# Altium PCB PCB2.PcbDoc
Units mm, origin at the board's own origin, x right, y up, seen from the top; angles counter-clockwise.
Board outline 36.13 x 29.98 mm, 2 copper layers (Top Layer, Bottom Layer); 5 components, 8 nets, 40 pads, 0 vias.
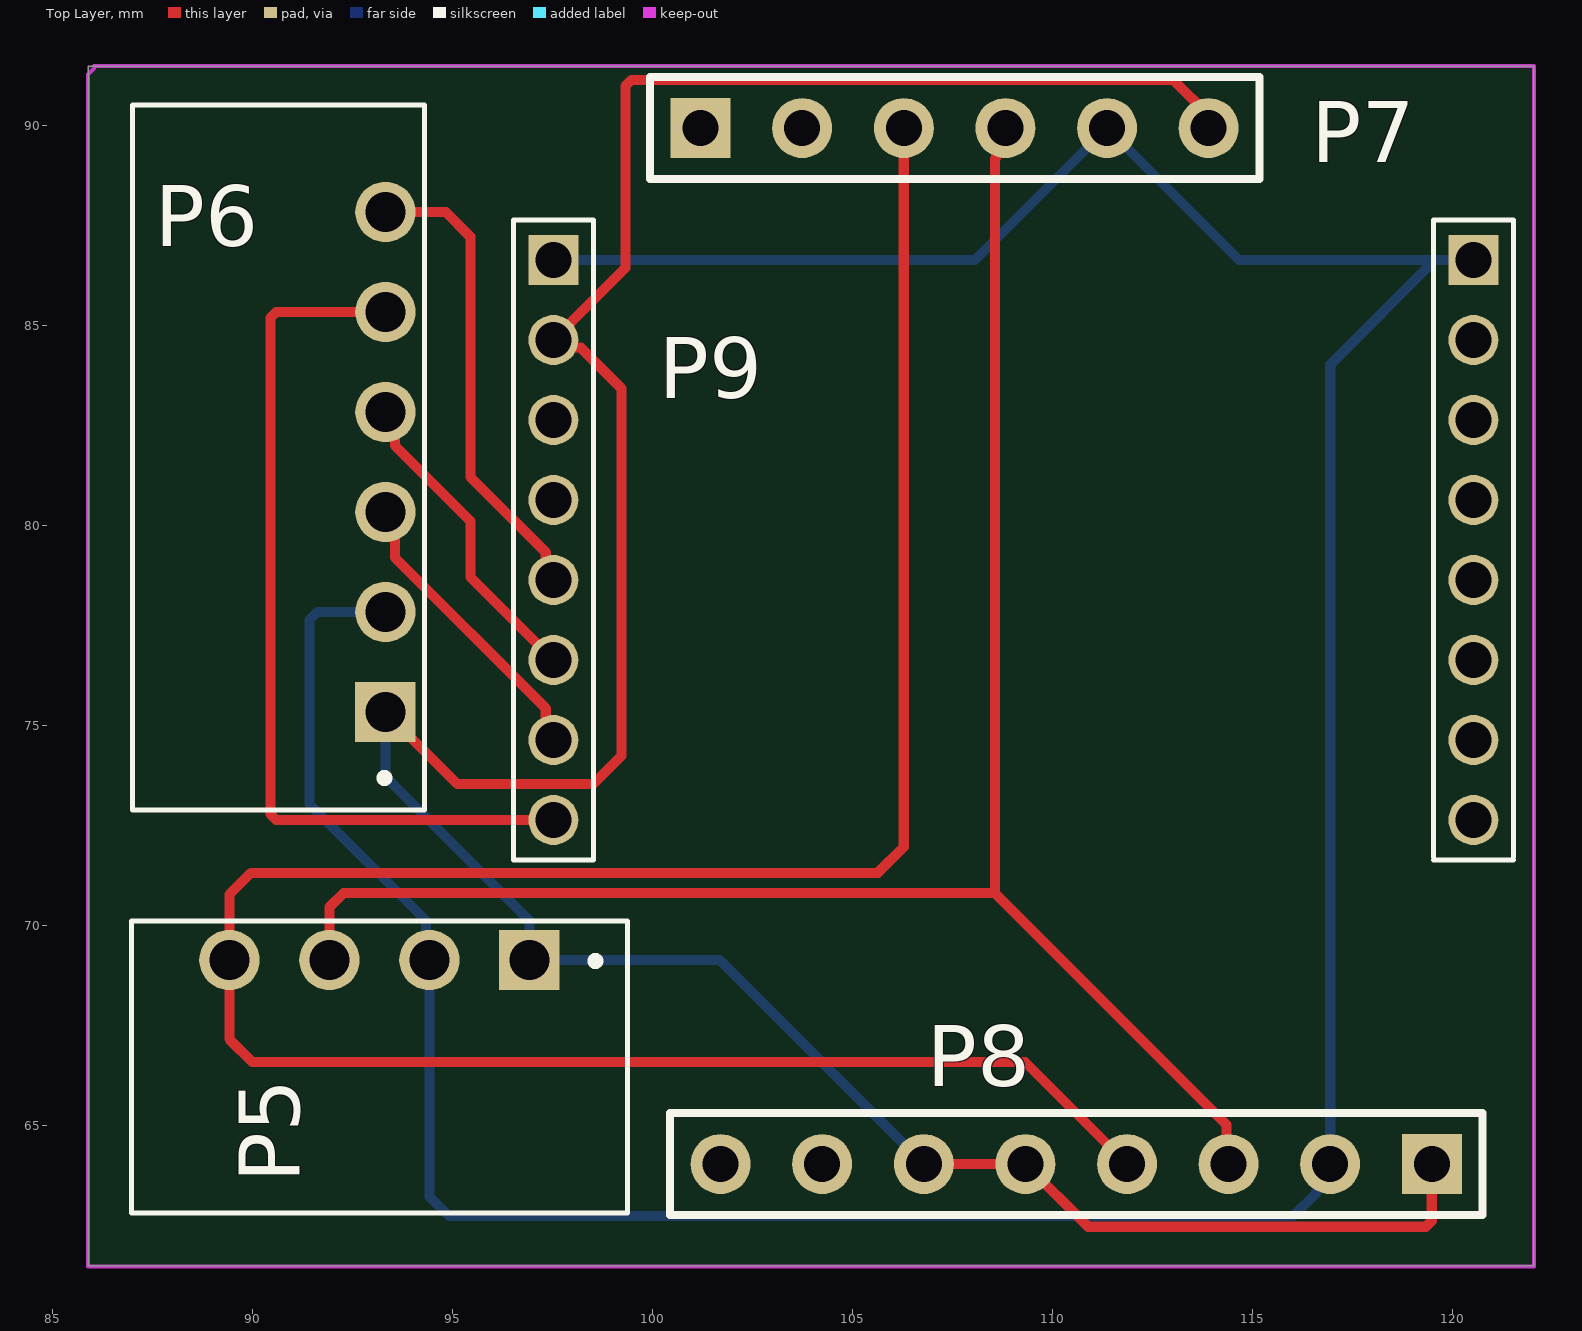
[diagram p0: Top Layer view]
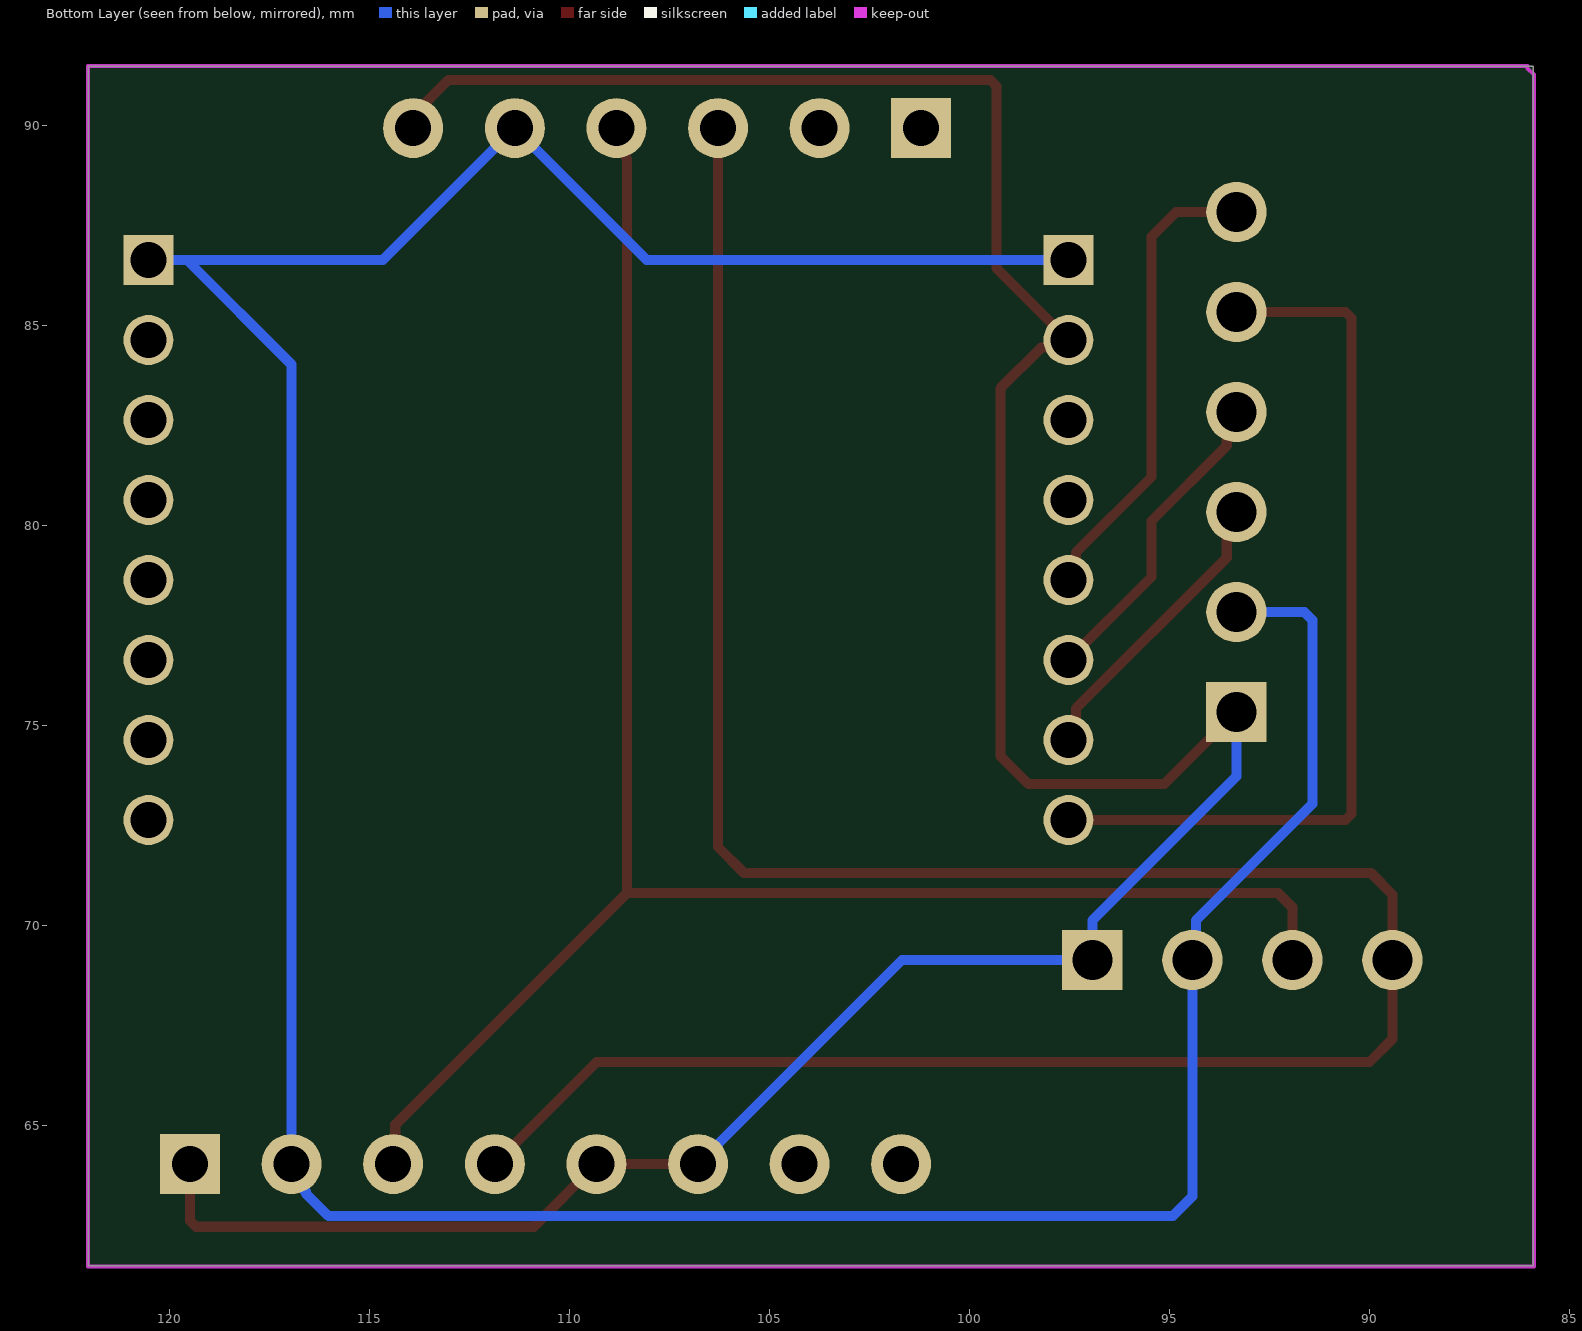
[diagram p1: Bottom Layer view, seen from below]

## Layer stack, top to bottom
Top Solder: solder mask 0.0102, Solder Resist, Dk 3.5
Top Layer: signal copper 0.0356
Dielectric 1: dielectric 0.32, FR-4, Dk 4.8
Bottom Layer: signal copper 0.0356
Bottom Solder: solder mask 0.0102, Solder Resist, Dk 3.5

## Board outline
85.903,61.501 122.036,61.501 122.036,91.484 85.903,91.484

## Design rules (kind name [scope] priority, off if disabled: settings)
Clearance [All] p1: gap=0.01 ignorepadtopadclearanceinfootprint=TRUE
PolygonConnect [All] p1: connectstyle=Relief reliefconductorwidth=0.254 reliefentries=4 polygonreliefangle="90 Angle" airgapwidth=0.254
RoutingVias [All] p1: holewidth=0.711 width=1.27 viastyle="Through Hole" minholewidth=0.711 minwidth=1.27 maxholewidth=0.711 maxwidth=1.27
SilkToSolderMaskClearance [IsPad] p1: minsilkscreentomaskgap=0.01 clearancetoexposedcopper=TRUE
SolderMaskExpansion [All] p1: expansion=0.102 istentingtop=FALSE
Width [All] p1: maxlimit=0.254 minlimit=0.254 preferedwidth=0.254
29 further rules are at their usual default settings.

## Components (designator, comment, footprint, x,y, rotation, side; value= is the part's Value field where it differs from the comment)
P5 "AUX_I2C" XH2.54-4P 93.176,70.119 r180 top
P6 "AUX_PMW" XH2.54-6P 94.301,79.094 r90 top
P7 "VL53L1X" HDR1X6 101.206,89.944 r0 top
P8 "LIS3MDL" HDR1X8 119.486,64.044 r180 top
P9 "ATK_PMW3901" ATK-PMW3901 109.526,80.644 r0 top

## Footprints (in the part's own frame and the unit in brackets; to place one, negate y for a bottom-side part, rotate by r counter-clockwise, add the part's x,y. Pads: shape width x height; smd on the part's side, far side on the other; paste and mask are expansions set on the pad)
ATK-PMW3901 [mm]
  rect 1.25x1.25 hole 0.9: 1(-12,6) 2(11,6)
  round 1.25 hole 0.9: 3(-12,4) 4(11,4) 5(-12,2) 6(11,2) 7(-12,0) 8(11,0) 9(-12,-2) 10(11,-2) 11(-12,-4) 12(11,-4) 13(-12,-6) 14(11,-6) 15(-12,-8) 16(11,-8)
  silkscreen extent -13,-9 12,7
HDR1X6 [mm] "Connector; Header; 6 Position"
  rect 1.5x1.5 hole 0.9: 1(0,0)
  round 1.5 hole 0.9: 2(2.54,0) 3(5.08,0) 4(7.62,0) 5(10.16,0) 6(12.7,0)
  silkscreen extent -1.27,-1.27 13.97,1.27
HDR1X8 [mm] "Connector; Header; 8 Position"
  rect 1.5x1.5 hole 0.9: 1(0,0)
  round 1.5 hole 0.9: 2(2.54,0) 3(5.08,0) 4(7.62,0) 5(10.16,0) 6(12.7,0) 7(15.24,0) 8(17.78,0)
  silkscreen extent -1.27,-1.27 19.05,1.27
XH2.54-4P [mm]
  rect 1.508x1.508 hole 1: 1(-3.75,0.975)
  round 1.508 hole 1: 2(-1.25,0.975) 3(1.25,0.975) 4(3.75,0.975)
  silkscreen extent -6.2,0 6.2,7.3
XH2.54-6P [mm]
  rect 1.508x1.508 hole 1: 1(-3.75,0.975)
  round 1.508 hole 1: 2(-1.25,0.975) 3(1.25,0.975) 4(3.75,0.975) 5(6.25,0.975) 6(8.75,0.975)
  silkscreen extent -6.2,0 11.43,7.3

## Part data
P5: library part "Header 4", "Header, 4-Pin", LatestRevisionDate=17-Jul-2002, LatestRevisionNote="Re-released for DXP Platform.", Publisher="Altium Limited"
P6 P7: library part "Header 6", "Header, 6-Pin", LatestRevisionDate=17-Jul-2002, LatestRevisionNote="Re-released for DXP Platform.", Publisher="Altium Limited"
P8: library part "Header 8", "Header, 8-Pin", LatestRevisionDate=17-Jul-2002, LatestRevisionNote="Re-released for DXP Platform.", Publisher="Altium Limited"
P9: library part "Header 8X2", "Header, 8-Pin, Dual row", LatestRevisionDate=17-Jul-2002, LatestRevisionNote="Re-released for DXP Platform.", Publisher="Altium Limited"

## Nets (pads, with @x,y where several pads share a name; then routed paths per layer and width w, separated by ;. In a path a pad name is that pad's centre, name@x,y a point inside that pad or via, vN(x,y) a via of type N, cw(c..) or ccw(c..) an arc to the next point about the centre after c; other vN are vias at no path point)
AUX_CS: P6.6 P9.9 | length 11.8
  Top Layer w0.254: P6.6 94.833,87.844 95.451,87.226 95.451,81.219 97.335,79.335 97.335,78.835 P9.9
AUX_GND: P5.2 P6.2 P7.5 P8.2 P9.1 P9.2 | length 90.4
  Bottom Layer w0.254: P6.2 91.626,77.844 91.426,77.644 91.426,73.044 94.34,70.13 P5.2@94.34,69.23 ; P5.2 94.426,63.232 94.914,62.744 116.026,62.744 116.59,63.308 116.59,63.351 116.946,63.707 116.946,84.028 119.562,86.644 ; P9.1 108.066,86.644 P7.5 114.666,86.644 119.562,86.644 ; P9.2 119.562,86.644
AUX_I2C_CL: P5.3 P7.4 P8.3 | length 46.5
  Top Layer w0.254: P5.3 91.926,70.463 92.278,70.815 108.565,70.815 ; P7.4 108.588,89.706 108.588,89.195 108.565,89.172 108.565,70.815 ; P8.3 114.354,64.096 114.354,65.026 108.565,70.815
AUX_I2C_DA: P5.4 P7.3 P8.4 | length 62.7
  Top Layer w0.254: P7.3 106.286,71.971 105.639,71.323 89.967,71.323 89.426,70.782 P5.4 89.426,67.165 89.998,66.593 109.317,66.593 P8.4
AUX_MISO: P6.3 P9.13 | length 7.4
  Top Layer w0.254: P6.3 93.566,80.104 93.566,79.204 97.335,75.435 97.335,74.835 P9.13
AUX_MOSI: P6.4 P9.11 | length 7.9
  Top Layer w0.254: P6.4 93.566,82.604 93.566,82.004 95.451,80.119 95.451,78.719 P9.11
AUX_SCK: P6.5 P9.15 | length 22.5
  Top Layer w0.254: P6.5 90.598,85.344 90.449,85.195 90.449,72.793 90.598,72.644 P9.15
AUX_VCC: P5.1 P6.1 P7.6 P8.1 P8.5 P8.6 P9.3 | length 75.2
  Top Layer w0.254: P6.1 95.126,73.544 98.526,73.544 99.226,74.244 99.226,83.436 98.208,84.453 97.717,84.453 P9.3 99.326,86.444 99.326,90.995 99.475,91.144 113.026,91.144 113.906,90.264 P7.6 ; P8.6 P8.5 110.893,62.477 119.337,62.477 119.486,62.626 P8.1
  Bottom Layer w0.254: P6.1 93.326,73.731 96.926,70.13 P5.1 101.686,69.144 P8.6
pads on no net: P7.1 P7.2 P8.7 P8.8 P9.4 P9.5 P9.6 P9.7 P9.8 P9.10 P9.12 P9.14 P9.16

## Keep-outs
Keep-Out Layer:
  lines w0.1: 86.046,91.434 85.891,91.279 85.891,61.484 122.036,61.484 122.036,91.494 86.046,91.494

## Silkscreen, mask and mechanical layers (free items; w line width, h text height)
Mechanical 1:
  the board outline again, w0.1